# Altium PCB PCB1.PcbDoc
Units mil, origin at the board's own origin, x right, y up, seen from the top; angles counter-clockwise.
Board outline 780.5 x 2362.1 mil, 2 copper layers (Top Layer, Bottom Layer); 8 components, 35 nets, 124 pads, 41 vias.
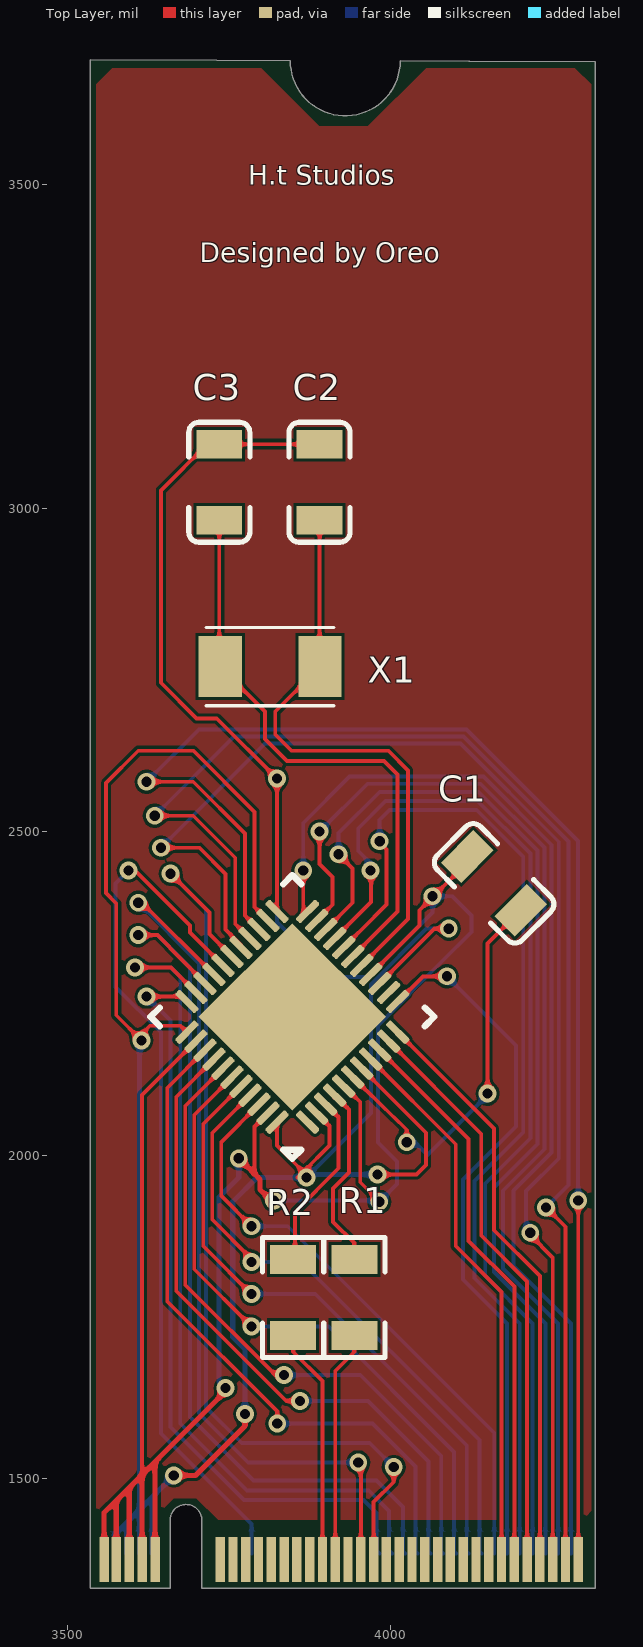
[diagram p0: Top Layer view]
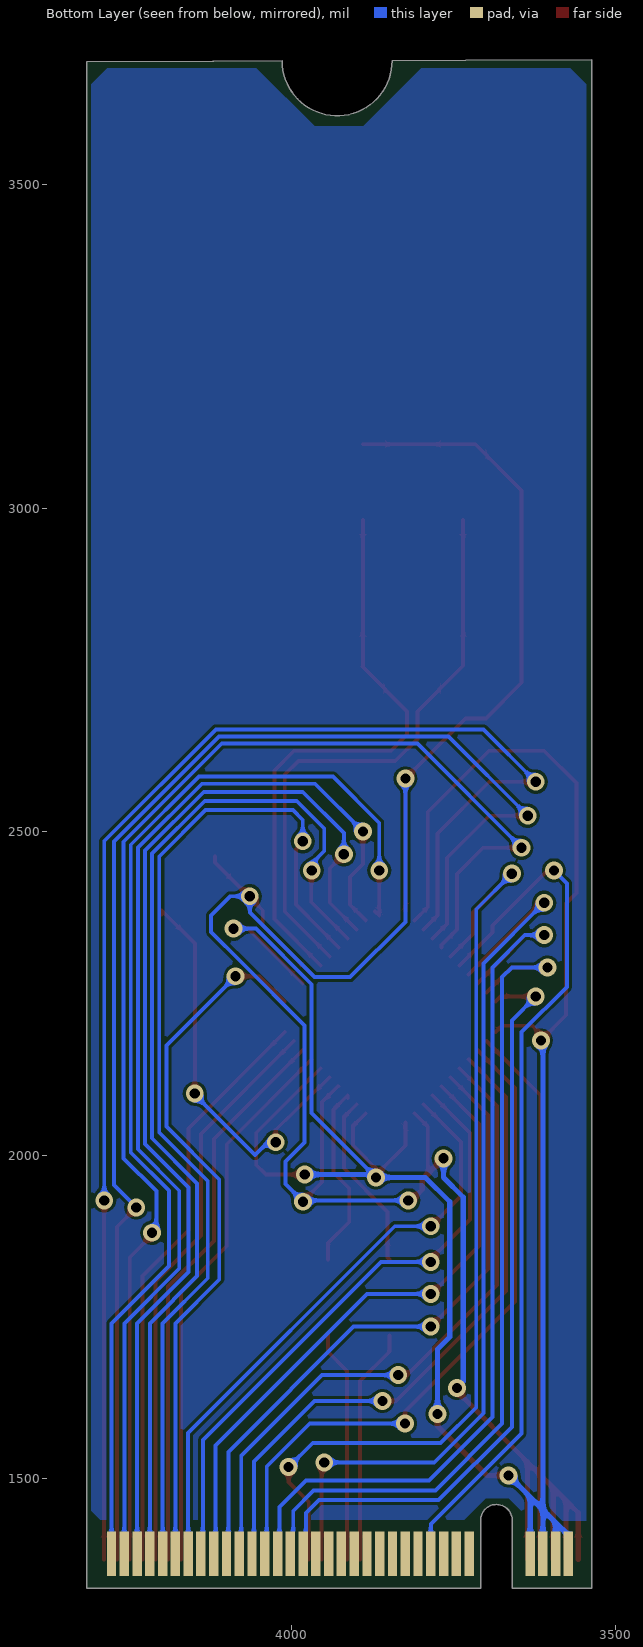
[diagram p1: Bottom Layer view, seen from below]
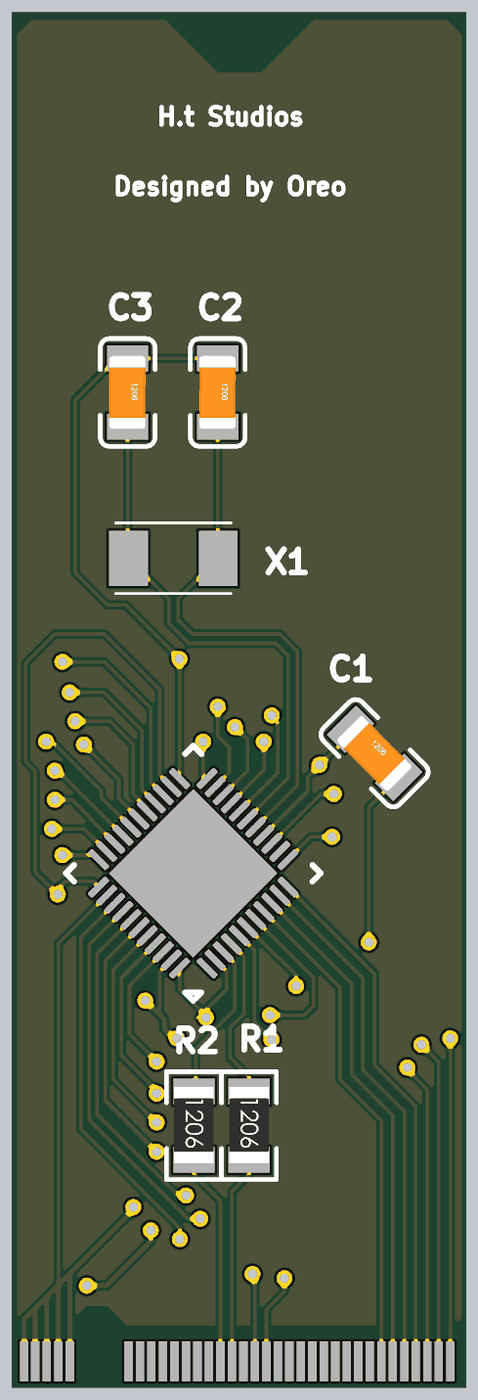
[diagram p2: 3D render of the assembled board from above, using the file's embedded part models]

## Layer stack, top to bottom
Top Solder: solder mask 0.4, Solder Resist, Dk 3.5
Top Layer: signal copper 1.4
Dielectric 1: dielectric 12.6, FR-4, Dk 4.8
Bottom Layer: signal copper 1.4
Bottom Solder: solder mask 0.4, Solder Resist, Dk 3.5

## Board outline
3536.21,1330.71 3536.21,3692.81 3536.21,3692.79 3731.33,3692.09 3844.99,3691.69 ccw(c3930,3691.39) 4015.01,3691.09 4121.58,3690.71 4316.71,3690.01 4316.71,3690 4316.71,1330.71 3708.41,1330.71 3708.41,1435.71 ccw(c3683.81,1435.43) 3659.21,1435.21 3659.21,1330.71

## Design rules (kind name [scope] priority, off if disabled: settings)
Clearance [All] p1: gap=5 ignorepadtopadclearanceinfootprint=TRUE
DiffPairsRouting [All] p1: maxlimit=10 minlimit=5 mostfreqgap=10 toplayer_minwidth=6 toplayer_maxwidth=15 toplayer_prefwidth=15 bottomlayer_minwidth=6 bottomlayer_maxwidth=15 bottomlayer_prefwidth=15 maxuncoupledlength=500
MinimumSolderMaskSliver [All] p1: minsoldermaskwidth=3
PolygonConnect [All] p1: connectstyle=Relief reliefconductorwidth=10 reliefentries=4 polygonreliefangle="90 Angle" airgapwidth=10
RoutingVias [All] p1: holewidth=28 width=50 viastyle="Through Hole" minholewidth=28 minwidth=50 maxholewidth=28 maxwidth=50
SolderMaskExpansion [All] p1: expansion=4
Width [All] p1: maxlimit=10 minlimit=5 preferedwidth=10 minimp=50.000000 maximp=50.000000 favimp=50.000000
28 further rules are at their usual default settings.

## Classes and differential pairs
component class Sheet1: C1 C2 C3 R1 R2 X1 ""
differential pair D1: +D1_P -D1_N
differential pair X: +X_P -X_N
differential pair D: +D_P -D_N

## Components (designator, comment, footprint, x,y, rotation, side; value= is the part's Value field where it differs from the comment)
C1 "1uF (105) 10% 50V" 1206_C 4160,2420 r315 top
C2 "220pF (221) 10% 50V" 1206_C 3890.27,3040 r270 top
C3 "220pF (221) 10% 50V" 1206_C 3735.27,3040 r270 top
GF1 "Core GoldFinger" "Core GoldFinger" 3921.21,1365.71 r0 top
MCU1 "32U4 MCU" 32U4 3848.13,2213.66 r135 top
R1 "22Ω (22R0) ±1%" 1206_R 3944.07,1780 r270 top
R2 "22Ω (22R0) ±1%" 1206_R 3849.35,1780 r270 top
X1 "晶振" OSC-SMD_2P-L5.0-W3.2 3813.77,2755 r180 top

## Footprints (in the part's own frame and the unit in brackets; to place one, negate y for a bottom-side part, rotate by r counter-clockwise, add the part's x,y. Pads: shape width x height; smd on the part's side, far side on the other; paste and mask are expansions set on the pad)
32U4 [mm]
  rrect50% 1.1x0.28 smd: 1(-3.35,2.5) 2(-3.35,2) 3(-3.35,1.5) 4(-3.35,1) 5(-3.35,0.5) 6(-3.35,0) 7(-3.35,-0.5) 8(-3.35,-1) 9(-3.35,-1.5) 10(-3.35,-2) 11(-3.35,-2.5) 23(3.35,-2.5) 24(3.35,-2) 25(3.35,-1.5) 26(3.35,-1) 27(3.35,-0.5) 28(3.35,0) 29(3.35,0.5) 30(3.35,1) 31(3.35,1.5) 32(3.35,2) 33(3.35,2.5)
  rrect50% 0.28x1.1 smd: 12(-2.5,-3.35) 13(-2,-3.35) 14(-1.5,-3.35) 15(-1,-3.35) 16(-0.5,-3.35) 17(0,-3.35) 18(0.5,-3.35) 19(1,-3.35) 20(1.5,-3.35) 21(2,-3.35) 22(2.5,-3.35) 34(2.5,3.35) 35(2,3.35) 36(1.5,3.35) 37(1,3.35) 38(0.5,3.35) 39(0,3.35) 40(-0.5,3.35) 41(-1,3.35) 42(-1.5,3.35) 43(-2,3.35) 44(-2.5,3.35)
  rect 5.2x5.2 smd: 45(0,0)
  silkscreen extent -3.94,-3.94 3.94,3.94
1206_C [mm]
  rect 1.13x1.8 smd: 1(-1.49,0) 2(1.49,0)
  silkscreen extent -2.36,-1.2 2.35,1.2, body extent -1.6,-0.81 1.6,0.79, height 1
1206_R [mm]
  rect 1.13x1.8 smd: 1(-1.49,0) 2(1.49,0)
  silkscreen extent -2.36,-1.2 2.35,1.2, body extent -1.7,-0.86 1.65,0.87, height 0.85
"Core GoldFinger" [mm]
  rect 0.368x1.75 smd: 1(9.371,0.236) 3(8.868,0.236) 5(8.366,0.236) 7(7.864,0.236) 9(7.362,0.236) 11(6.86,0.236) 13(6.358,0.236) 15(5.856,0.236) 17(5.354,0.236) 19(4.852,0.236) 21(4.349,0.236) 23(3.847,0.236) 25(3.345,0.236) 27(2.843,0.236) 29(2.341,0.236) 31(1.839,0.236) 33(1.337,0.236) 35(0.835,0.236) 37(0.333,0.236) 39(-0.169,0.236) 41(-0.672,0.236) 43(-1.174,0.236) 45(-1.676,0.236) 47(-2.178,0.236) 49(-2.68,0.236) 51(-3.182,0.236) 53(-3.684,0.236) 55(-4.186,0.236)
  rect 0.368x1.75 smd far side: 2(9.08,0.468) 4(8.579,0.468) 6(8.078,0.468) 8(7.576,0.468) 10(7.075,0.468) 12(6.574,0.468) 14(6.072,0.468) 16(5.571,0.468) 18(5.069,0.468) 20(4.568,0.468) 22(4.067,0.468) 24(3.565,0.468) 26(3.064,0.468) 28(2.563,0.468) 30(2.061,0.468) 32(1.56,0.468) 34(1.058,0.468) 36(0.557,0.468) 38(0.056,0.468) 40(-0.446,0.468) 42(-0.947,0.468) 44(-1.448,0.468) 46(-1.95,0.468) 48(-2.451,0.468) 50(-2.953,0.468) 52(-3.454,0.468) 54(-3.955,0.468) 56(-4.457,0.468) 58(-4.958,0.468) 68(-7.354,0.468) 70(-7.854,0.468) 72(-8.354,0.468) 74(-8.854,0.468)
  rect 0.375x1.75 smd: 57(-4.685,0.236) 67(-7.243,0.236) 69(-7.751,0.236) 71(-8.259,0.236) 73(-8.767,0.236) 75(-9.243,0.236)
OSC-SMD_2P-L5.0-W3.2 [mm]
  rect 1.7x2.4 smd: 1(-1.96,0) 2(1.96,0)
  silkscreen extent -2.51,-1.54 2.51,1.54

## Part data
C1: library part "1206 1uF (105) 10% 50V", "贴片电容", Package=1206, SuppliersPartNumber=C1848, ComponentLink1Description=¹©Ó, ComponentLink1URL=http://www.szlcsc.com/product/details_2200.html, Supplier=LC
C2 C3: library part "1206 220pF (221) 10% 50V", "贴片电容", Package=1206, SuppliersPartNumber=C1854, ComponentLink1Description=¹©Ó, ComponentLink1URL=http://www.szlcsc.com/product/details_2206.html, Supplier=LC
R1 R2: library part "1206 22Ω (22R0) 1%", "贴片电阻", Package=1206, SuppliersPartNumber=C17958, ComponentLink1Description=¹©Ó, ComponentLink1URL=http://www.szlcsc.com/product/details_18646.html, Supplier=LC

## Via types
v1: diameter 27.56, hole 15.75, Top Layer to Bottom Layer, 41 vias

## Nets (pads, with @x,y where several pads share a name; then routed paths per layer and width w, separated by ;. In a path a pad name is that pad's centre, name@x,y a point inside that pad or via, vN(x,y) a via of type N, cw(c..) or ccw(c..) an arc to the next point about the centre after c; other vN are vias at no path point)
CLED: GF1.35 MCU1.30 | length 1420.1
  Top Layer w6: v1(3610,2390) 3616.12,2390 MCU1.30 ; v1(3950,1525) 3954.07,1520.93 GF1.35
  Bottom Layer w6: v1(3610,2390) 3703.97,2296.03 3703.97,1601.03 3780,1525 v1(3950,1525)
COL1: GF1.2 MCU1.22 | length 1767.3
  Top Layer w6: v1(3865,2440) 3865,2369.89 3871.79,2376.68 MCU1.22
  Bottom Layer w6: v1(3865,2440) 3865,2513.41 3936.59,2585 4143.74,2585 4249,2479.74 4249,2004 4190,1945 4190,1828.71 4278.71,1740 GF1.2
COL2: GF1.4 MCU1.21 | length 1727.7
  Top Layer w6: MCU1.21 3910,2386.89 3910,2430 3890.27,2449.73 v1(3890.27,2500)
  Bottom Layer w6: v1(3890.27,2500) 3964.27,2574 4139.19,2574 4238,2475.19 4238,2008.98 4174,1944.98 4174,1824.97 4258.97,1740 GF1.4
COL3: GF1.6 MCU1.20 | length 1694.2
  Top Layer w6: MCU1.20 3900.07,2348.68 3941.39,2390 3941.39,2443.28 v1(3919.67,2465)
  Bottom Layer w6: v1(3919.67,2465) 3919.67,2497.96 3983.22,2561.5 4136.13,2561.5 4227,2470.63 4227,2017 4160,1950 4160,1819.23 4239.23,1740 GF1.6
COL4: GF1.8 MCU1.19 | length 1659.9
  Top Layer w6: MCU1.19 3970,2391.21 v1@3970,2440
  Bottom Layer w6: v1(3969.23,2440) 3969.23,2450.77 3950,2470 3950,2505 3992.43,2547.43 4134.65,2547.43 4216,2466.07 4216,2026 4146.34,1956.34 4146.34,1813.15 4219.49,1740 GF1.8
COL5: GF1.10 MCU1.18 | length 1625
  Top Layer w6: MCU1.18 3975,2368.37 3975,2368.75 3993.61,2387.36 3993.61,2472.57 v1@3981.18,2485
  Bottom Layer w6: v1(3983.15,2485) 3983.15,2518.15 3998.28,2533.28 4133.23,2533.28 4205,2461.52 4205,2035 4130,1960 4130,1809.75 4199.75,1740 GF1.10
COL6: GF1.12 MCU1.12 | length 1090.7
  Top Layer w6: MCU1.12 4050,2276.34 v1(4087.12,2276.34)
  Bottom Layer w6: v1(4087.12,2276.34) 4194,2169.46 4194,2044 4112.22,1962.22 4112.22,1807.79 4180.01,1740 GF1.12
COL7: GF1.14 MCU1.42 | length 936.3
  Top Layer w6: v1(3785.23,1890) 3738.4,1936.82 3738.4,2020.42 MCU1.42
  Bottom Layer w6: v1@3775,1890 v1(3785.23,1890) 3841.03,1890 4160.27,1570.76 GF1.14
COL8: GF1.16 MCU1.41 | length 955
  Top Layer w6: MCU1.41 3724.48,2034.34 3724.48,1900.4 3785.23,1839.65 v1(3785.23,1835)
  Bottom Layer w6: v1@3780,1835 v1(3785.23,1835) 3861.94,1835 4137.53,1559.41 4137.53,1387.13 GF1.16
COL9: GF1.18 MCU1.40 | length 986.6
  Top Layer w6: MCU1.40 3710.56,2048.26 3710.56,1859.44 v1@3790,1780
  Bottom Layer w6: v1@3780,1785.42 v1(3785.23,1785.42) 3883.61,1785.42 4117.79,1551.24 4117.79,1387.13 GF1.18
COL10: GF1.20 MCU1.39 | length 997.7
  Top Layer w6: MCU1.39 3696.64,2062.18 3696.64,1823.58 v1(3785.23,1735)
  Bottom Layer w6: v1(3785.23,1735) 3904.45,1735 4098.05,1541.4 4098.05,1387.13 GF1.20
COL11: GF1.22 MCU1.38 | length 1016.2
  Top Layer w6: MCU1.38 3682.72,2076.09 3682.72,1799.43 3822.15,1660 v1(3835.46,1660)
  Bottom Layer w6: v1(3835.46,1660) 3953.2,1660 4078.31,1534.88 4078.31,1387.13 GF1.22
COL12: GF1.24 MCU1.37 | length 1025
  Top Layer w6: MCU1.37 3668.8,2090.01 3668.8,1789.95 3838.75,1620 v1(3860,1620)
  Bottom Layer w6: v1(3860,1620) 3965.28,1620 4058.58,1526.71 4058.58,1387.13 GF1.24
COL13: GF1.26 MCU1.36 | length 1048.8
  Top Layer w6: MCU1.36 3654.89,2103.93 3654.89,1773.86 3825,1603.75 v1(3825,1585)
  Bottom Layer w6: v1(3825,1585) 3972.37,1585 4038.84,1518.53 4038.84,1387.13 GF1.26
COL14: GF1.28 MCU1.31 | length 1390.1
  Top Layer w6: v1(3610,2340) 3639.99,2340 3640.46,2339.53 MCU1.31
  Bottom Layer w6: v1(3610,2340) 3640,2340 3690,2290 3690,1595 3788.22,1496.78 3978.22,1496.78 4019.1,1455.9 4019.1,1387.13 GF1.28
COL15: GF1.30 MCU1.32 | length 1316.1
  Top Layer w6: v1@3612,2290 3660.44,2290 MCU1.32
  Bottom Layer w6: v1(3605,2290) 3660,2290 3675,2275 3675,1585 3778.22,1481.78 3966.32,1481.78 3997.87,1450.23 3997.87,1388.62 GF1.30
COL16: GF1.32 MCU1.33 | length 1183.7
  Top Layer w6: v1(3622.99,2245) 3677.6,2245 MCU1.33
  Bottom Layer w6: v1(3622.99,2245) 3660,2207.99 3660,1580 3773.22,1466.78 3958.22,1466.78 3978.13,1446.87 3978.13,1388.62 GF1.32
D1_N: GF1.41 R2.2 | length 365.2
  Top Layer w6: R2.2 3849.35,1696.09 3894.77,1650.67 GF1.41
D1_P: GF1.39 R1.2 | length 358.6
  Top Layer w6: GF1.39 3914.54,1666.56 3944.07,1696.09 R1.2
D_N: MCU1.3 R2.1 | length 277.4
  Top Layer w6: R2.1 3852.35,1841.66 3852.35,1912.35 3919.67,1979.67 3919.67,2058.61 MCU1.3
D_P: MCU1.4 R1.1 | length 291
  Top Layer w6: MCU1.4@3913.55,2088.32 MCU1.4 3935.67,2070.45 3935.67,1973.04 3911.31,1948.69 3911.31,1896.66 3944.07,1863.91 R1.1
GND: C1.1 C2.1 C3.1 GF1.67 GF1.69 GF1.71 GF1.73 GF1.75 MCU1.5 MCU1.15 MCU1.23 MCU1.35 MCU1.43 | length 4879.1
  Top Layer w6: 3616.05,1506.05 3616.05,2092.93 MCU1.35 ; v1@3745,1635 v1(3745,1640) ; 3790,1970.49 3790,2044.18 MCU1.43 ; MCU1.23 v1(3824.47,2581.92) 3731.39,2675 3700,2675 3645,2730 3645,3027.28 3716.39,3098.66 C3.1 C2.1 ; MCU1.5 3928.52,2106.48 3953.2,2081.8 3953.2,1957.98 v1@3981.18,1930 ; MCU1.15 4045,2354.85 4045,2378.52 4118.52,2452.04 C1.1
  Top Layer w8: GF1.75 3557.33,1447.33 3576.05,1466.05 ; GF1.73 3576.05,1466.05 ; GF1.71 3596.05,1486.05 ; GF1.69 3616.05,1506.05 ; GF1.67 3636.05,1526.05 ; v1@3745,1635 3636.05,1526.05 ; v1(3765.49,1995) 3790,1970.49 3798.4,1962.09 3798.4,1946.6 v1@3815,1930 ; 3576.05,1466.05 3596.05,1486.05 ; 3596.05,1486.05 3616.05,1506.05 ; 3616.05,1506.05 3636.05,1526.05
  Bottom Layer w6: v1(3820,1930) 3980.4,1930 v1(3982.62,1927.78) 4010,1955.17 4010,1990 3980.4,2019.6 3980.4,2060.33 3980.56,2060.49 3980.56,2200.57 4078.1,2298.12 4125,2345 4125,2370.53 4095.53,2400 v1(4065,2400) 4065,2375 3965,2275 3910,2275 3824.47,2360.53 v1(3824.47,2581.92)
  Bottom Layer w8: v1(3745,1640) 3735,1650 3735,1935 3765.49,1965.49 v1(3765.49,1995)
K_LED: GF1.52 MCU1.29 | length 1364.5
  Top Layer w6: v1(3595,2440) 3605,2440 3690,2355 3690,2343.96 MCU1.29
  Bottom Layer w6: v1(3595,2440) 3575,2420 3575,2260 3645,2190 3645,1570 3785.23,1429.77 GF1.52
NetC1_2: C1.2 MCU1.6 | length 621.4
  Top Layer w6: MCU1.6 4025,2039.14 v1(4025,2020) ; v1(4150,2095) 4150,2327.04 C1.2 C1.2@4201.48,2371.48
  Bottom Layer w6: v1(4025,2020) 4036.99,2020 4056.99,2000 4150,2093.01 v1(4150,2095)
NLED: GF1.33 MCU1.28 | length 1499
  Top Layer w6: v1(3660,2435) 3720,2375 3720,2341.8 MCU1.28 ; GF1.33 3973.84,1463.84 4005,1495 v1(4005,1517.78)
  Bottom Layer w6: v1(3660,2435) 3715,2380 3715,1610 3770,1555 3967.78,1555 v1(4005,1517.78)
ROW1: GF1.1 MCU1.25 | length 2238.9
  Top Layer w6: v1(3622.99,2577.01) 3695,2577.01 3775,2497.01 3775,2370.31 MCU1.25 ; v1(4290,1930) 4280.13,1930 4290.13,1920 GF1.1
  Bottom Layer w6: v1(3622.99,2577.01) 3703.97,2658 4117.41,2658 4290,2485.41 v1(4290,1930)
ROW2: GF1.3 MCU1.26 | length 2179.6
  Top Layer w6: v1(3635.49,2524.51) 3695,2524.51 3760,2459.51 3760,2357.47 MCU1.26 ; v1(4240.41,1919.18) 4270.36,1889.23 GF1.3
  Bottom Layer w6: v1(3635.49,2524.51) 3757.97,2647 4112.86,2647 4275,2484.86 4275,1953.76 v1(4240.41,1919.18)
ROW3: GF1.5 MCU1.27 | length 2132.3
  Top Layer w6: v1(3645,2475) 3704.73,2475 3745,2434.73 3745,2348.68 3768.79,2324.89 MCU1.27 ; v1(4216,1880) 4216,1876.58 4250.59,1841.99 GF1.5
  Bottom Layer w6: v1(3645,2475) 3806,2636 4108.3,2636 4260,2484.3 4260,1995 4209.32,1944.32 4209.32,1886.68 v1(4216,1880)
ROW4: GF1.7 MCU1.11 | length 906.1
  Top Layer w6: MCU1.11 4160,2040.99 4160,1883.87 4230.82,1813.04 GF1.7
ROW5: GF1.9 MCU1.10 | length 889.7
  Top Layer w6: MCU1.10 4140.23,2032.92 4140.23,1875.68 4211.06,1804.86 GF1.9
ROW6: GF1.11 MCU1.9 | length 873.4
  Top Layer w6: MCU1.9 4120.46,2024.85 4120.46,1867.49 4191.29,1796.67 GF1.11
ROW7: GF1.13 MCU1.8 | length 857
  Top Layer w6: MCU1.8 4100.7,2016.78 4100.7,1859.3 4171.52,1788.48 GF1.13
VCC: GF1.68 GF1.70 GF1.72 GF1.74 MCU1.2 MCU1.7 MCU1.14 MCU1.24 MCU1.34 MCU1.44 | length 3950.1
  Top Layer w6: MCU1.34 3675.27,2200 3627.84,2200 3615,2187.16 v1(3615,2177.16) 3576.05,2216.12 3576.05,2388.95 3560,2405 3560,2575 3610,2625 3695.23,2625 3790,2530.23 3790,2383.15 MCU1.24 ; MCU1.44 3824.47,2014.88 v1@3865.03,1974.32 ; MCU1.2 3905.44,2045 3905.44,2014.73 v1@3865.03,1974.32 ; MCU1.7 4055,2034.63 4055,1985 4040,1970 v1(3980,1970) ; MCU1.14 4067.98,2350 v1(4090,2350) ; v1@3865.03,1974.32 3856.2,1965.49 v1(3870,1965.49) 3870,1969.35 v1@3865.03,1974.32
  Top Layer w8: v1(3665,1505) 3698.56,1505 3775,1581.44 v1(3775,1600)
  Bottom Layer w6: GF1.74 GF1.74@3572.63,1412.63 ; v1@3612,2174.16 v1(3615,2177.16) ; 3885.49,1970 3875.49,1960 v1(3870,1965.49) 3969.56,2065.04 3969.56,2264 4055.56,2350 v1(4090,2350)
  Bottom Layer w8: GF1.74@3572.63,1412.63 3592.31,1432.31 ; GF1.72 3592.31,1432.31 ; GF1.70 3612,1452 ; v1@3612,2174.16 3612,1452 ; GF1.68 3631.68,1471.68 ; v1(3665,1505) 3631.68,1471.68 ; v1(3775,1600) 3775,1700 3756,1719 3756,1927.78 3793.7,1965.49 v1@3857.22,1965.49 ; 3885.49,1970 v1(3980,1970) ; 3592.31,1432.31 3612,1452 ; 3612,1452 3631.68,1471.68
X_N: C2.2 MCU1.16 X1.1 | length 919.7
  Top Layer w6: C2.2 3890.27,2755.66 X1.1 3821.77,2685.83 3821.77,2650 3846.77,2625 3996.63,2625 4026.99,2594.64 4026.99,2364.68 MCU1.16
X_P: C3.2 MCU1.17 X1.2 | length 905.2
  Top Layer w6: C3.2 3735.27,2756.33 X1.2 3805.77,2685.83 3805.77,2643.37 3840.15,2609 3990,2609 4010.99,2588.01 4010.99,2376.52 MCU1.17
pads on no net: GF1.15 GF1.17 GF1.19 GF1.21 GF1.23 GF1.25 GF1.27 GF1.29 GF1.31 GF1.34 GF1.36 GF1.37 GF1.38 GF1.40 GF1.42 GF1.43 GF1.44 GF1.45 GF1.46 GF1.47 GF1.48 GF1.49 GF1.50 GF1.51 GF1.53 GF1.54 GF1.55 GF1.56 GF1.57 GF1.58 MCU1.1 MCU1.13 MCU1.45

## Polygon pours and split planes (outlines as drawn)
no net on Top Layer "NONET_L01_P000" (solid, pour order 0): 3545,1435 3545,3655 3570,3680 3800,3680 3890,3590 3965,3590 4055,3680 4285,3680 4310,3655 4310,1450 4296.1,1436.1 3733.9,1436.1 3700,1470 3665,1470 3630,1435
no net on Bottom Layer "NONET_L02_P001" (solid, pour order 1): 3545,1435 3545,3655 3570,3680 3800,3680 3890,3590 3965,3590 4055,3680 4285,3680 4310,3655 4310,1450 4296.1,1436.1 3733.9,1436.1 3700,1470 3665,1470 3630,1435

## Silkscreen, mask and mechanical layers (free items; w line width, h text height)
Top Overlay:
  text "H.t Studios" at 3780,3500 h30
  text "Designed by Oreo" at 3705,3380 h30
Mechanical 1:
  lines w5: 3731.33,3692.09 3536.21,3692.79 3536.21,1330.71 3659.21,1330.71 3659.21,1435.21 cw(c3683.81,1435.43) 3708.41,1435.71 3708.41,1330.71 4316.71,1330.71 4316.71,3690 4121.58,3690.71 ; 3731.33,3692.09 3844.99,3691.69 ccw(c3930,3691.39) 4015.01,3691.09 4121.58,3690.71 ; 3731.33,3692.09 3731.33,3692.09 ; 4121.58,3690.71 4121.58,3690.71